# EAGLE board SkecthMiniSumo-TB6612FNG (EAGLE 9.3.0)
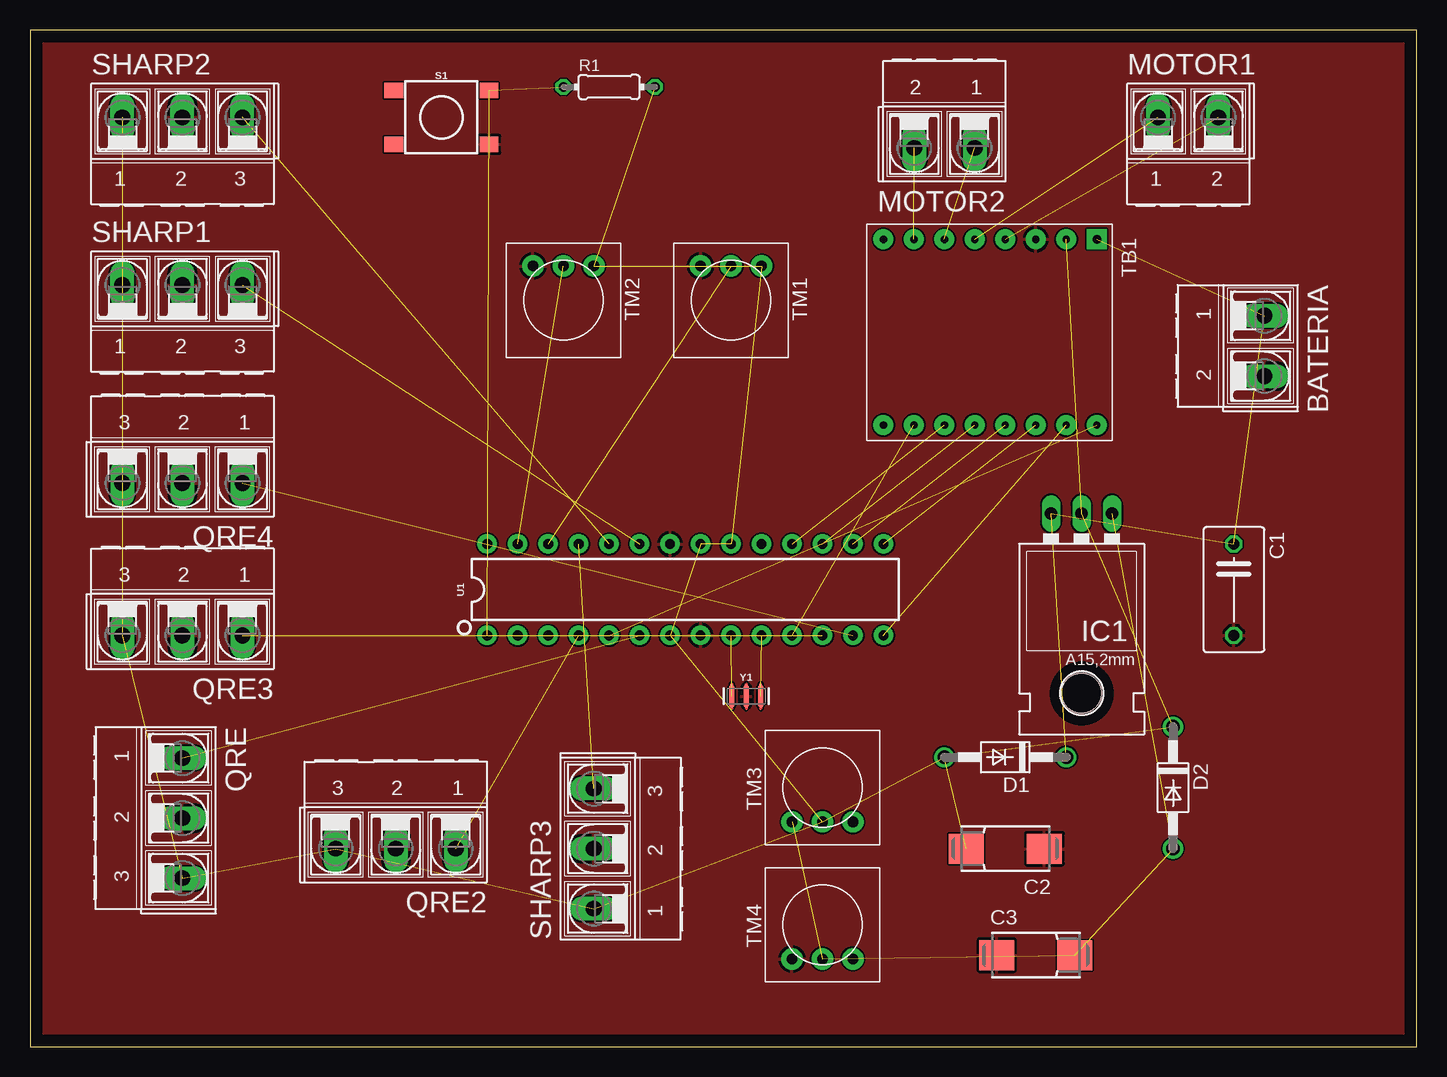
[diagram p0: board, top side]

Size 115.55 x 84.76 mm. Coordinates in mm from the lower left corner, seen from the top.
Outline: 0,0 115.55,0 115.55,84.76 0,84.76 0,0
Copper layers (1*16): Top 0.035mm / dielectric 1.5mm / Bottom 0.035mm
Design rules "default": minimum track width 6mil, minimum drill 0.35mm, track to track 6mil, track to pad 6mil, pad to pad 6mil, via to via 6mil, smd to smd 6mil, copper to edge 40mil, drill to drill 6mil, minimum pad ring 10mil, minimum via ring 8mil, stop-mask expansion 4mil, vias tented up to drill 0mil, thermal gap 10mil

## Footprints (pad centres in the part's own frame; a part is rotated, then mirrored left to right if it is on the bottom)
AK500/2-H = drill 1.321 long: 1 -2.515,0; 2 2.515,0
C075-052X106 = drill 0.914 octagon: 1 -3.81,0; 2 3.81,0
085CS_1AR = smd 2.9 x 2.5: + 3.25,0; - -3.25,0
DO41-10 = drill 1.118: A 5.08,0; C -5.08,0
TO220L1 = drill 1.016 long: 1 -2.54,-3.81; 2 0,-3.81; 3 2.54,-3.81 | hole 3.302: 0,11.176
AK500/3-H = drill 1.321 long: 1 -5.004,0; 2 0,0; 3 5.004,0
0204/7 = drill 0.813 octagon: 1 -3.81,0; 2 3.81,0
TACTILE_SWITCH_SMD_6.2MM_TALL = smd 1.55 x 1.3: A1 -3.975,-2.25; A2 3.975,-2.25; B1 -3.975,2.25; B2 3.975,2.25
TB6612FNG = drill 0.6 pad 1.676: A1 -7.62,-1.27; A2 -7.62,-3.81; AIN1 7.874,1.27; AIN2 7.874,3.81; B1 -7.62,-8.89; B2 -7.62,-6.35; BIN1 7.874,-3.81; BIN2 7.874,-6.35; GND1 -7.62,1.27; GND2 -7.62,-11.43; GND3 7.874,-11.43; PWMA 7.874,6.35; PWMB 7.874,-8.89; STBY 7.874,-1.27; VCC -7.62,3.81 | drill 0.7 pad 1.676 square: VM -7.62,6.35
TRIM-3386 = drill 0.9 pad 1.778: 1 -2.54,-2.857; 2 0,-2.857; 3 2.54,-2.857
DIP28 = drill 0.813 pad 1.626: 1 -16.51,-3.81; 2 -13.97,-3.81; 3 -11.43,-3.81; 4 -8.89,-3.81; 5 -6.35,-3.81; 6 -3.81,-3.81; 7 -1.27,-3.81; 8 1.27,-3.81; 9 3.81,-3.81; 10 6.35,-3.81; 11 8.89,-3.81; 12 11.43,-3.81; 13 13.97,-3.81; 14 16.51,-3.81; 15 16.51,3.81; 16 13.97,3.81; 17 11.43,3.81; 18 8.89,3.81; 19 6.35,3.81; 20 3.81,3.81; 21 1.27,3.81; 22 -1.27,3.81; 23 -3.81,3.81; 24 -6.35,3.81; 25 -8.89,3.81; 26 -11.43,3.81; 27 -13.97,3.81; 28 -16.51,3.81
RESONATOR-SMD-3.2X1.3 = smd 0.45 x 1.905: 1 -1.2,0; 2 0,0; 3 1.2,0

## Placement (x,y rotation side)
BATERIA  [AK500/2-H]  102.87,58.42 270 top
C1  0.1uF  [C075-052X106]  100.33,38.1 270 top
C2  1uF  [085CS_1AR]  81.28,16.51 180 top
C3  10uF  [085CS_1AR]  83.82,7.62 0 top
D1  1N4002  [DO41-10]  81.28,24.13 180 top
D2  1N4002  [DO41-10]  95.25,21.59 270 top
IC1  LM317MB  [TO220L1]  87.63,40.64 180 top
MOTOR1  [AK500/2-H]  96.52,77.47 0 top
MOTOR2  [AK500/2-H]  76.2,74.93 180 top
QRE  [AK500/3-H]  12.7,19.05 270 top
QRE2  [AK500/3-H]  30.48,16.51 180 top
QRE3  [AK500/3-H]  12.7,34.29 180 top
QRE4  [AK500/3-H]  12.7,46.99 180 top
R1  [0204/7]  48.26,80.01 0 top
S1  MOMENTARY-SWITCH-SPST-SMD-6.2MM-TALL  [TACTILE_SWITCH_SMD_6.2MM_TALL]  34.29,77.47 0 top
SHARP1  [AK500/3-H]  12.7,63.5 0 top
SHARP2  [AK500/3-H]  12.7,77.47 0 top
SHARP3  [AK500/3-H]  46.99,16.51 90 top
TB1  TB6612FNG  [TB6612FNG]  82.55,59.69 270 top
TM1  [TRIM-3386]  58.42,62.23 180 top
TM2  [TRIM-3386]  44.45,62.23 180 top
TM3  [TRIM-3386]  66.04,21.59 0 top
TM4  [TRIM-3386]  66.04,10.16 0 top
U1  328P  [DIP28]  54.61,38.1 0 top
Y1  16MHz  [RESONATOR-SMD-3.2X1.3]  59.69,29.21 0 top

## Library data of the parts
BATERIA MOTOR1 MOTOR2 QRE QRE2-QRE4 SHARP1-SHARP3 = con-ptr500; OC_FARNELL: unknown; OC_NEWARK: unknown
C1 = rcl; SPICEPREFIX: C
C2 C3 R1 = resistor
D1 D2 = diode
IC1 = v-reg; PARTNUMBER: LM317M
S1 = SparkFun-Switches; PROD_ID: SWCH-11966; SF_SKU: COM-12992
TB1 = TB6612FNG
TM1-TM4 = adafruit
U1 = SparkFun-IC-Microcontroller; PROD_ID: IC-09136
Y1 = SparkFun-Clocks; PROD_ID: XTAL-08900

## Nets
GND: BATERIA.2 C1.2 C2.- C3.- QRE2.2 QRE3.2 QRE4.2 QRE.2 S1.A2 SHARP1.2 SHARP2.2 SHARP3.2 TB1.GND1 TM1.3 TM2.3 TM4.1 U1.8 U1.22 Y1.2
N$1: U1.9 Y1.1
N$2: U1.10 Y1.3
N$3: R1.1 S1.B2 U1.1
N$4: TB1.AIN2 U1.14
N$5: TB1.AIN1 U1.15
N$6: MOTOR1.2 TB1.A1
N$7: MOTOR1.1 TB1.A2
N$8: MOTOR2.1 TB1.B2
N$9: MOTOR2.2 TB1.B1
N$10: TB1.PWMA U1.5
N$11: TB1.STBY U1.16
N$12: TB1.BIN1 U1.17
N$13: C3.+ D2.A IC1.1 TM3.1 TM4.2
N$14: SHARP1.3 U1.23
N$15: SHARP2.3 U1.24
N$16: SHARP3.3 U1.25
N$17: QRE2.1 U1.4
N$18: QRE4.1 U1.13
N$19: QRE3.1 U1.12
N$20: QRE.1 U1.6
N$21: TB1.BIN2 U1.18
N$22: TB1.PWMB U1.11
N$23: TM2.2 U1.27
N$25: TM1.2 U1.26
VIN: BATERIA.1 C1.1 D1.C IC1.3 TB1.VM
VO: C2.+ D1.A D2.C IC1.2 QRE2.3 QRE3.3 QRE4.3 QRE.3 R1.2 SHARP1.1 SHARP2.1 SHARP3.1 TB1.VCC TM1.1 TM2.1 TM3.2 U1.7 U1.20 U1.21

## Tracks (layer width: path | path; a pad name or v marks a point on that pad's centre or on a via)
GND
  pour Top: -1.27,-15.24 -1.27,85.09 0,86.36 161.29,86.36 162.56,85.09 162.56,-15.24 160.02,-17.78 1.27,-17.78
N$1  (1 unrouted)
N$2  (1 unrouted)
N$3  (2 unrouted)
N$4  (1 unrouted)
N$5  (1 unrouted)
N$6  (1 unrouted)
N$7  (1 unrouted)
N$8  (1 unrouted)
N$9  (1 unrouted)
N$10  (1 unrouted)
N$11  (1 unrouted)
N$12  (1 unrouted)
N$13  (4 unrouted)
N$14  (1 unrouted)
N$15  (1 unrouted)
N$16  (1 unrouted)
N$17  (1 unrouted)
N$18  (1 unrouted)
N$19  (1 unrouted)
N$20  (1 unrouted)
N$21  (1 unrouted)
N$22  (1 unrouted)
N$23  (1 unrouted)
N$25  (1 unrouted)
VIN  (4 unrouted)
VO  (18 unrouted)